# Altium PCB PCB1.PcbDoc
Units mil, origin at the board's own origin, x right, y up, seen from the top; angles counter-clockwise.
Board outline 4500 x 2600 mil, 2 copper layers (Top Layer, Bottom Layer), stack 60.4 mil thick; 6 components, 7 nets, 27 pads, 0 vias.
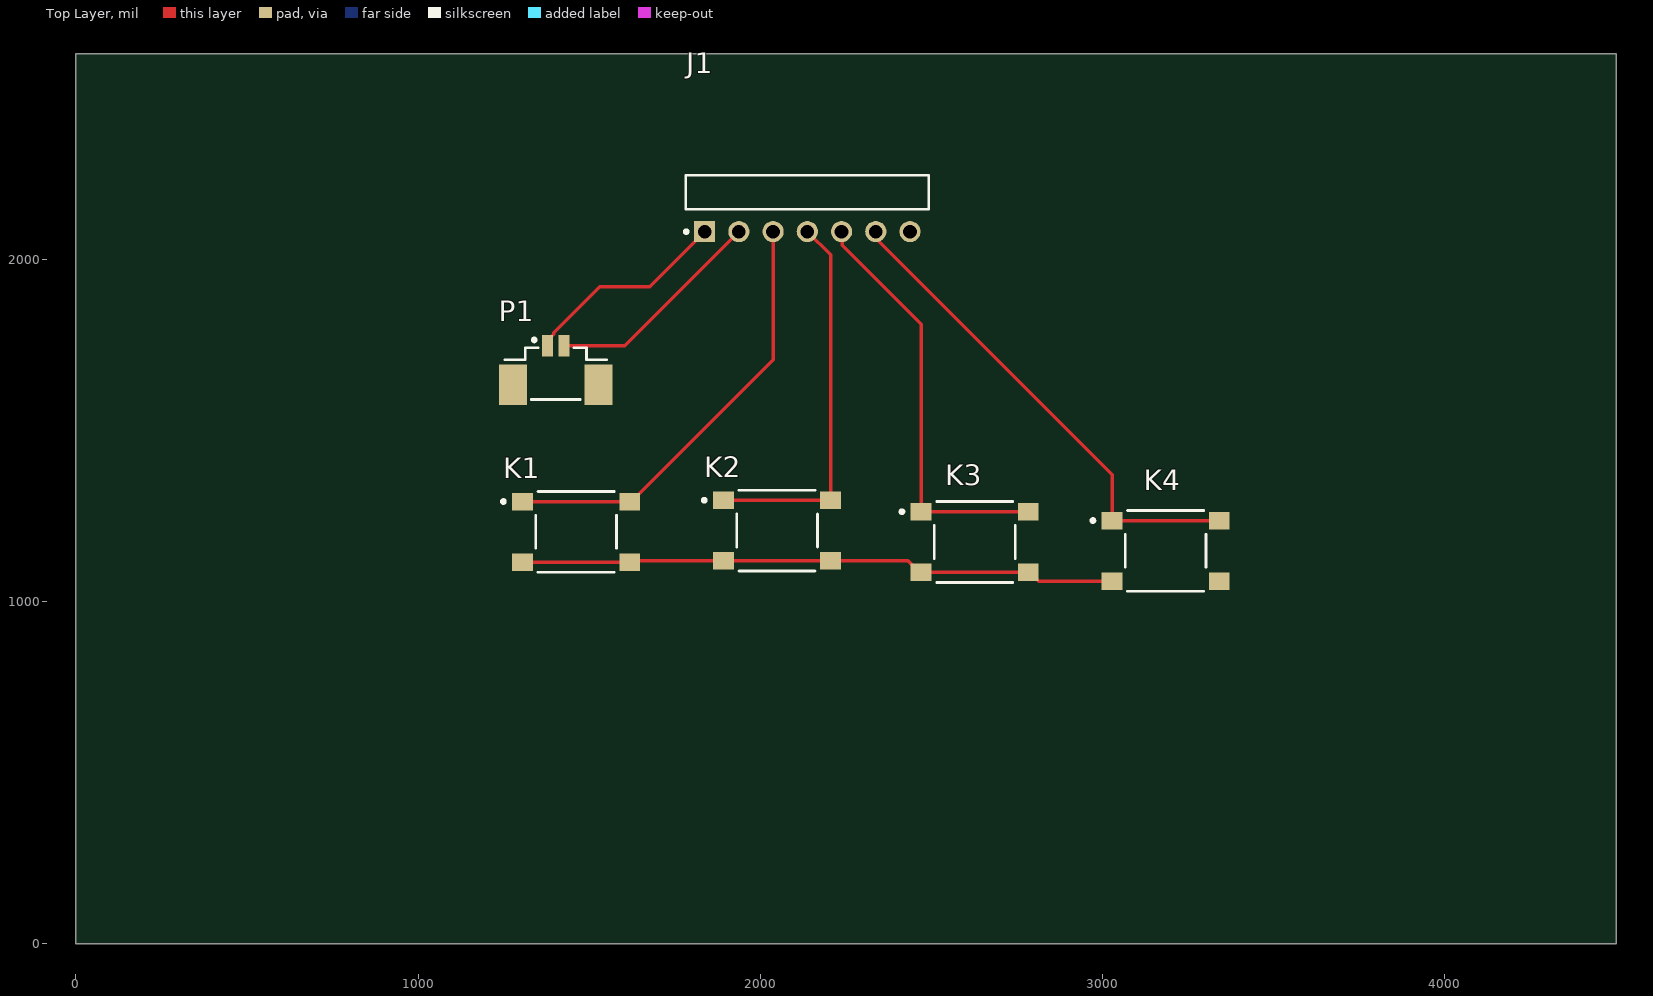
[diagram p0: Top Layer view]
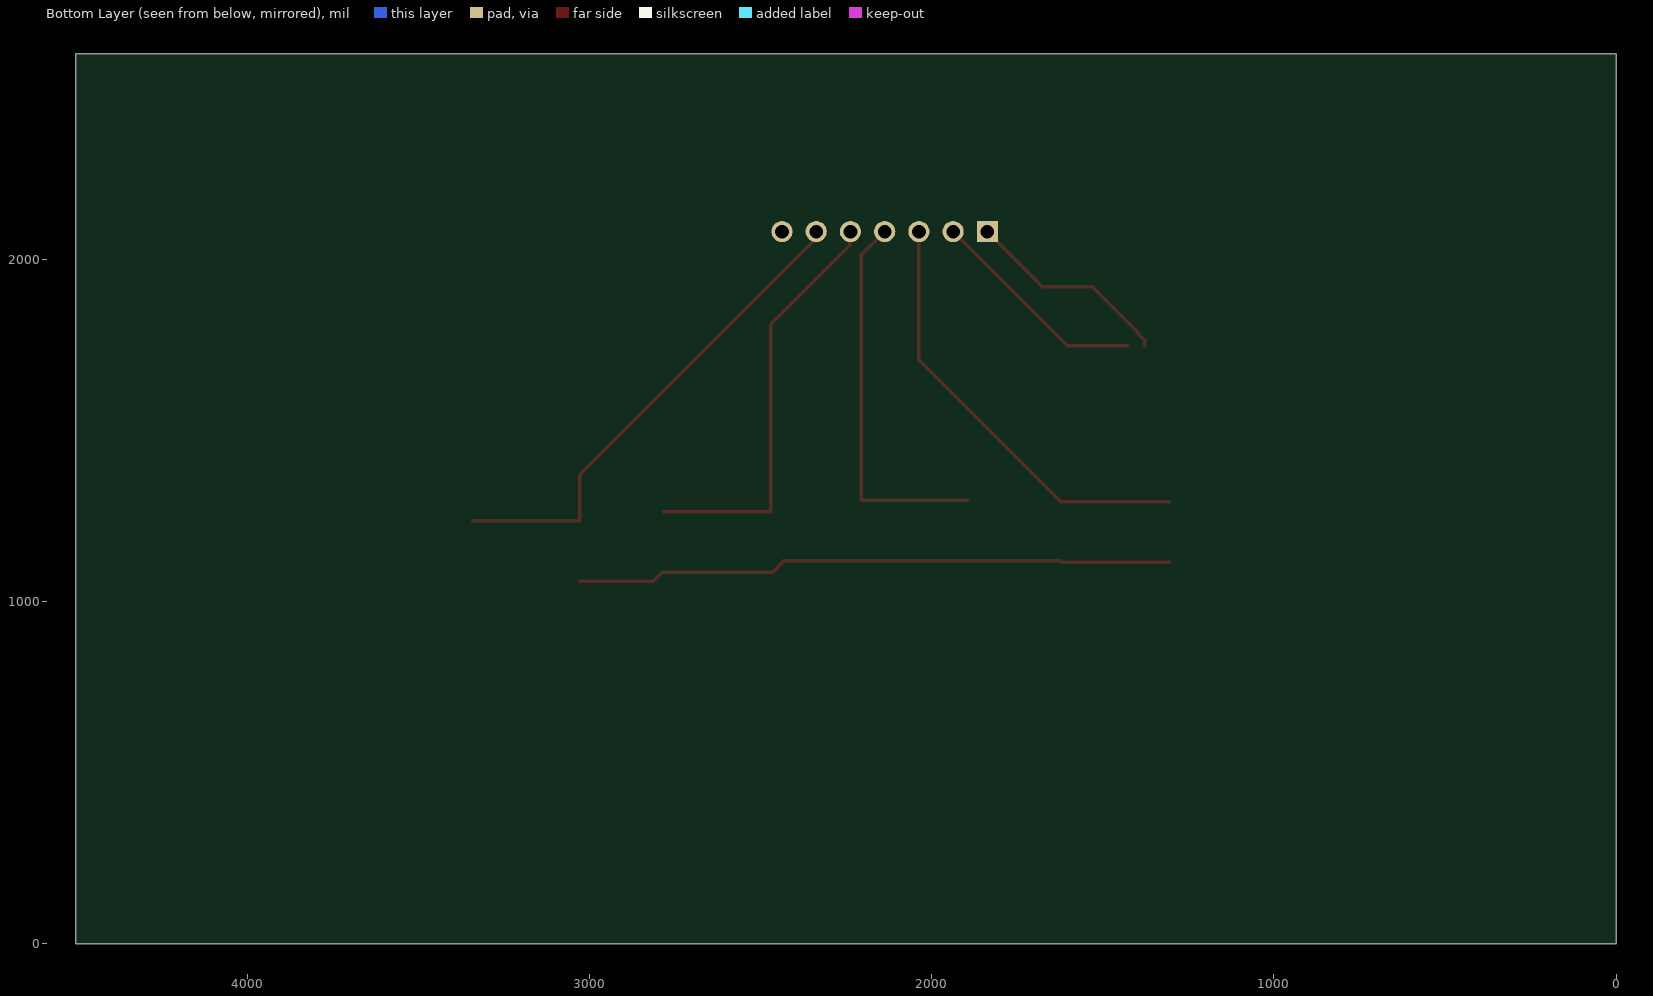
[diagram p1: Bottom Layer view, seen from below]
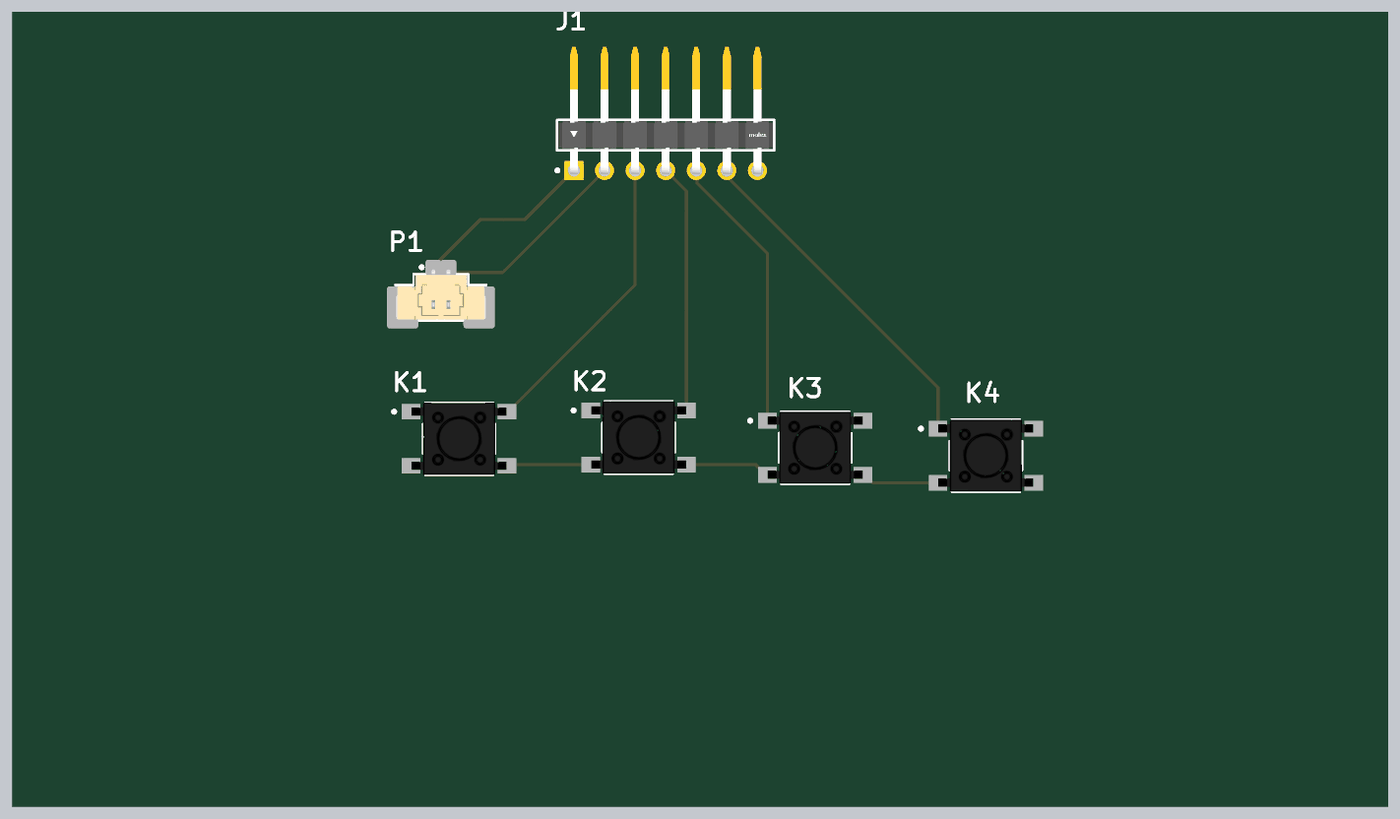
[diagram p2: 3D render of the assembled board from above, using the file's embedded part models]

## Layer stack, top to bottom
Top Solder: solder mask 0.5, Solder Resist, Dk 3.3
Top Layer: signal copper 0.7
Dielectric1: core 59, FR-4, Dk 4.3
Bottom Layer: signal copper 0.7
Bottom Solder: solder mask 0.5, Solder Resist, Dk 3.3

## Board outline
0,0 4500,0 4500,2600 0,2600

## Design rules (kind name [scope] priority, off if disabled: settings)
Clearance [All] p1: gap=10 ignorepadtopadclearanceinfootprint=FALSE
DiffPairsRouting [All] p1: maxlimit=10 minlimit=10 mostfreqgap=10 toplayer_minwidth=10 toplayer_maxwidth=10 toplayer_prefwidth=10 bottomlayer_minwidth=10 bottomlayer_maxwidth=10 bottomlayer_prefwidth=10 maxuncoupledlength=500
HoleSize [All] p1: absolutevalues=TRUE maxlimit=300 minlimit=10 maxpercent=80.000 minpercent=20.000
MinimumAnnularRing [All] p1: minimumring=10
PasteMaskExpansion [All] p1: expansion=10
PlaneClearance [All] p1: clearance=15
PlaneConnect [All] p1: pad.planeconnectstyle=Relief pad.reliefexpansion=20 pad.reliefentries=4 pad.reliefconductorwidth=10 pad.reliefairgap=10 via.planeconnectstyle=Direct via.reliefexpansion=20 via.reliefentries=4 via.reliefconductorwidth=10 via.reliefairgap=10
PolygonConnect [All] p1: thpad.connectstyle=Relief thpad.reliefconductorwidth=10 thpad.reliefentries=4 thpad.polygonreliefangle="90 Angle" thpad.airgapwidth=10 smdpad.connectstyle=Relief smdpad.reliefconductorwidth=10 smdpad.reliefentries=4 smdpad.polygonreliefangle="90 Angle" smdpad.airgapwidth=10 via.connectstyle=Direct via.reliefconductorwidth=10 via.reliefentries=4 via.polygonreliefangle="90 Angle" via.airgapwidth=10
RoutingVias [All] p1: holewidth=10 width=20 viastyle="Through Hole" minholewidth=10 minwidth=20 maxholewidth=10 maxwidth=20
SMDNeckDown [All] p1: percent=100.000
SilkToSolderMaskClearance SilkscreenOverComponentPads [IsPad] p1: minsilkscreentomaskgap=10 clearancetoexposedcopper=TRUE
SolderMaskExpansion [All] p1: expansion=10 istentingtop=FALSE
SupplyNets "Schematic Supply Nets" [InNet('GND')] p1: voltage=0.000
Width [All] p1: maxlimit=10 minlimit=10 preferedwidth=10
24 further rules are at their usual default settings.

## Components (designator, comment, footprint, x,y, rotation, side; value= is the part's Value field where it differs from the comment)
J1 "0022288072" FP-0022288072-MFG 2137,2196 r0 top
K1 "PTS645SM43SMTR92LFS" FP-PTS645SM43SMTR92LFS-MFG 1461.5,1203.53 r0 top
K2 "PTS645SM43SMTR92LFS" FP-PTS645SM43SMTR92LFS-MFG 2048.48,1207.46 r0 top
K3 "PTS645SM43SMTR92LFS" FP-PTS645SM43SMTR92LFS-MFG 2626,1174 r0 top
K4 "PTS645SM43SMTR92LFS" FP-PTS645SM43SMTR92LFS-MFG 3184,1148 r0 top
P1 "653102124022" 653102124022 1402,1666 r0 top

## Footprints (in the part's own frame and the unit in brackets; to place one, negate y for a bottom-side part, rotate by r counter-clockwise, add the part's x,y. Pads: shape width x height; smd on the part's side, far side on the other; paste and mask are expansions set on the pad)
653102124022 [mm] "1.25mm SMT Male Vertical Shrouded Header, 2p"
  rect 0.81x1.6 smd: 1(-0.625,2.07) 2(0.625,2.07)
  rect 2.1x3 smd: MP1(-3.175,-0.83) MP2(3.175,-0.83)
  silkscreen extent -3.77,-1.92 3.77,2.62, body extent -3.72,-1.85 3.72,2.36, height 4.74
FP-0022288072-MFG [mm]
  rect 1.57x1.57 hole 1.02 paste-2539.97 mask+0: 1(-7.62,-2.925)
  round 1.57 hole 1.02 paste-2539.97 mask+0: 2(-5.08,-2.925) 3(-2.54,-2.925) 4(0,-2.925) 5(2.54,-2.925) 6(5.08,-2.925) 7(7.62,-2.925)
  silkscreen extent -9.11,-3.05 9.02,1.27, body extent -9.12,-3.81 9.12,7.95, height 0.25
FP-PTS645SM43SMTR92LFS-MFG [mm]
  rect 1.55x1.3 smd paste+0 mask+0: 1(-3.975,2.25) 2(3.975,2.25) 3(-3.975,-2.25) 4(3.975,-2.25)
  silkscreen extent -5.52,-3 3,3, body extent -4.85,-3.1 4.85,3.1, height 0.25

## Part data
J1: library part CMP-00257-17768919-1, "0022288072 KK 254 Breakaway Header Right-Angle Surface Mount Compatible 7 Circuits 0.38", Color=Black, Contact Resistance=20mΩ, Current Rating=4A, Manufacturer Lifecycle Status=ACTIVE, Max Operating Temperature=75°C, Max Voltage Rating (AC)=250V, Min Operating Temperature=0°C, Connector Type="Male Pin", Contact Material=Brass, Contact Mating Length=6.1976mm, Contact Plating=Gold, Country of Origin=US, Depth=10.27mm, Gender=Male, Housing Color=Black, Housing Material=Thermoplastic, Lead Free="Lead Free", Length=17.78mm, Lifecycle Status=Production, Mount="Through Hole", NexarPartId=17768919, Number of Circuits=7, Number Of Contacts=7, Number of Positions=7, Number Of Rows=1, Orientation="Right Angle", Packaging=Bulk, Pitch=2.54mm, Plating=Tin, RoHS=Compliant, Schedule B="8536694040, 8536694040", Termination=Solder
K1 K2 K3 K4: library part CMP-2000-05160-2, "SWITCH TACTILE SPST-NO 0.05A 12V", Case/Package=SMD/SMT, Color=Black, Contact Resistance=100mR, Current Rating=50mA, Max Operating Temperature=60°C, Max Voltage Rating (DC)=12V, Min Operating Temperature=-20°C, Operating Force=160gf, Package Quantity=1, Actuator Length=0.85mm, Actuator Material=Nylon, Actuator Type=Standard, Contact Material=Silver, Contact Plating=Silver, Depth=9mm, Illumination Type=Non-Illuminated, Lead Free="Lead Free", Length=6mm, Max Current Rating=50mA, Mechanical Life=100000Cycles, Mount="Surface Mount", Orientation=Straight, Packaging="Tape and Reel", REACH SVHC="No SVHC", Switch Function=Off-Mom, Termination="Gull Wing", Throw Configuration=SPST, Voltage Rating (DC)=12V
P1: library part CMP-1502-00757-2, Color="Beige, White", Contact Resistance=20mΩ, Current Rating=1A, Flammability Rating="UL94 V-0", Insulation Resistance=100MΩ, Max Operating Temperature=85°C, Min Operating Temperature=-40°C, Operating Supply Voltage=125V, Connector Type="Male Pin", Contact Gender=Male, Contact Material=Copper, Contact Mating Length=2.159mm, Contact Plating=Tin, Gender=Male, Height=4.75mm, Housing Material=Nylon, Insulation=Insulated, Lead Pitch=1.25mm, Length=7.25mm, Mount="Surface Mount", NexarPartId=18818273, Number Of Contacts=2, Number of Pins=2, Number of Positions=2, Number Of Rows=1, Orientation=Vertical, Packaging="Tape and Reel", Pitch=1.25mm, REACH SVHC=Unknown, RoHS=Compliant, Termination=SMD/SMT, Voltage Rating=125V, Width=7.25mm

## Nets (pads, with @x,y where several pads share a name; then routed paths per layer and width w, separated by ;. In a path a pad name is that pad's centre, name@x,y a point inside that pad or via, vN(x,y) a via of type N, cw(c..) or ccw(c..) an arc to the next point about the centre after c; other vN are vias at no path point)
GND: K1.3 K1.4 K2.3 K2.4 K3.3 K3.4 K4.3 | length 1748.8
  Top Layer w10: K1.3 K1.4 1621.94,1118.88 K2.3 K2.4 2431.12,1118.88 2464.58,1085.42 K3.3 2787.42,1085.42 2813.42,1059.42 K4.3
NetJ1_1: J1.1 P1.1 | length 609.1
  Top Layer w10: P1.1 1377.39,1763.05 1395.66,1781.31 1395.66,1785.21 1530.46,1920 1676.16,1920 J1.1
NetJ1_2: J1.2 P1.2 | length 648.5
  Top Layer w10: P1.2 1603.65,1747.5 J1.2
NetJ1_3: J1.3 K1.1 K1.2 | length 1273.2
  Top Layer w10: K1.1 K1.2 ; K1.2@1622.92,1292.11 2037,1706.19 J1.3
NetJ1_4: J1.4 K2.1 K2.2 | length 1125.9
  Top Layer w10: K2.1 K2.2 2204.98,2012.87 J1.4
NetJ1_5: J1.5 K3.1 K3.2 | length 1227.6
  Top Layer w10: J1.5 2239.21,2078.64 2239.21,2040.79 2469.5,1810.5 K3.1 K3.2
NetJ1_6: J1.6 K4.1 K4.2 | length 1443.3
  Top Layer w10: J1.6 2346.91,2070.93 2346.91,2051.09 3027.5,1370.5 K4.1 K4.2
pads on no net: J1.7 K4.4 P1.MP1 P1.MP2